# EAGLE board single-spi-interface (EAGLE 6.5.0)
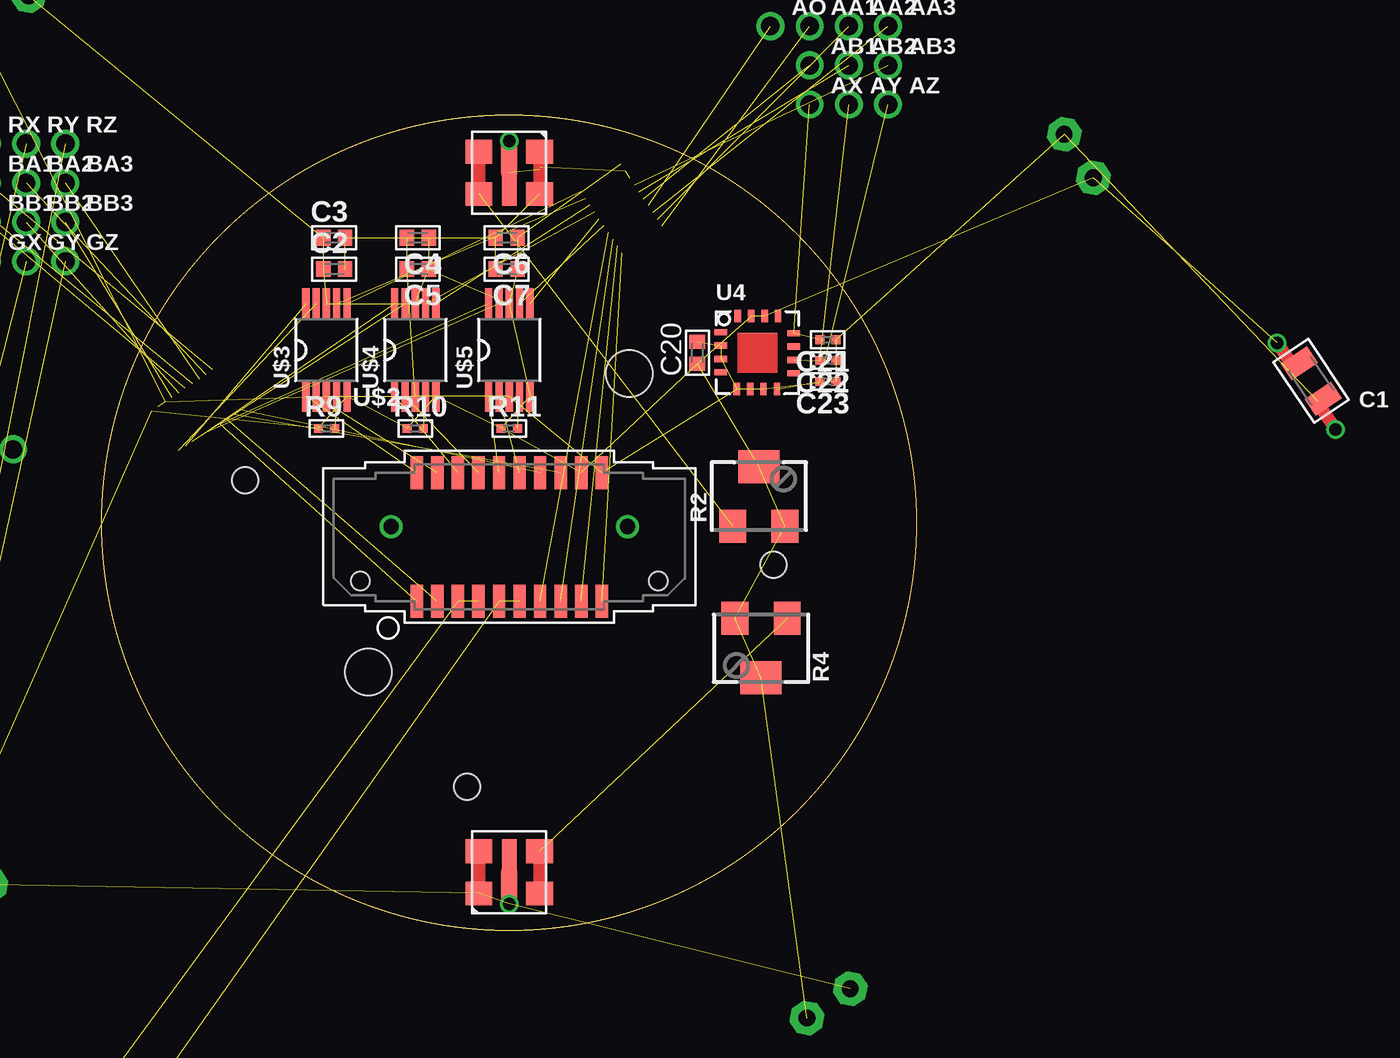
[diagram p0: board, top side]
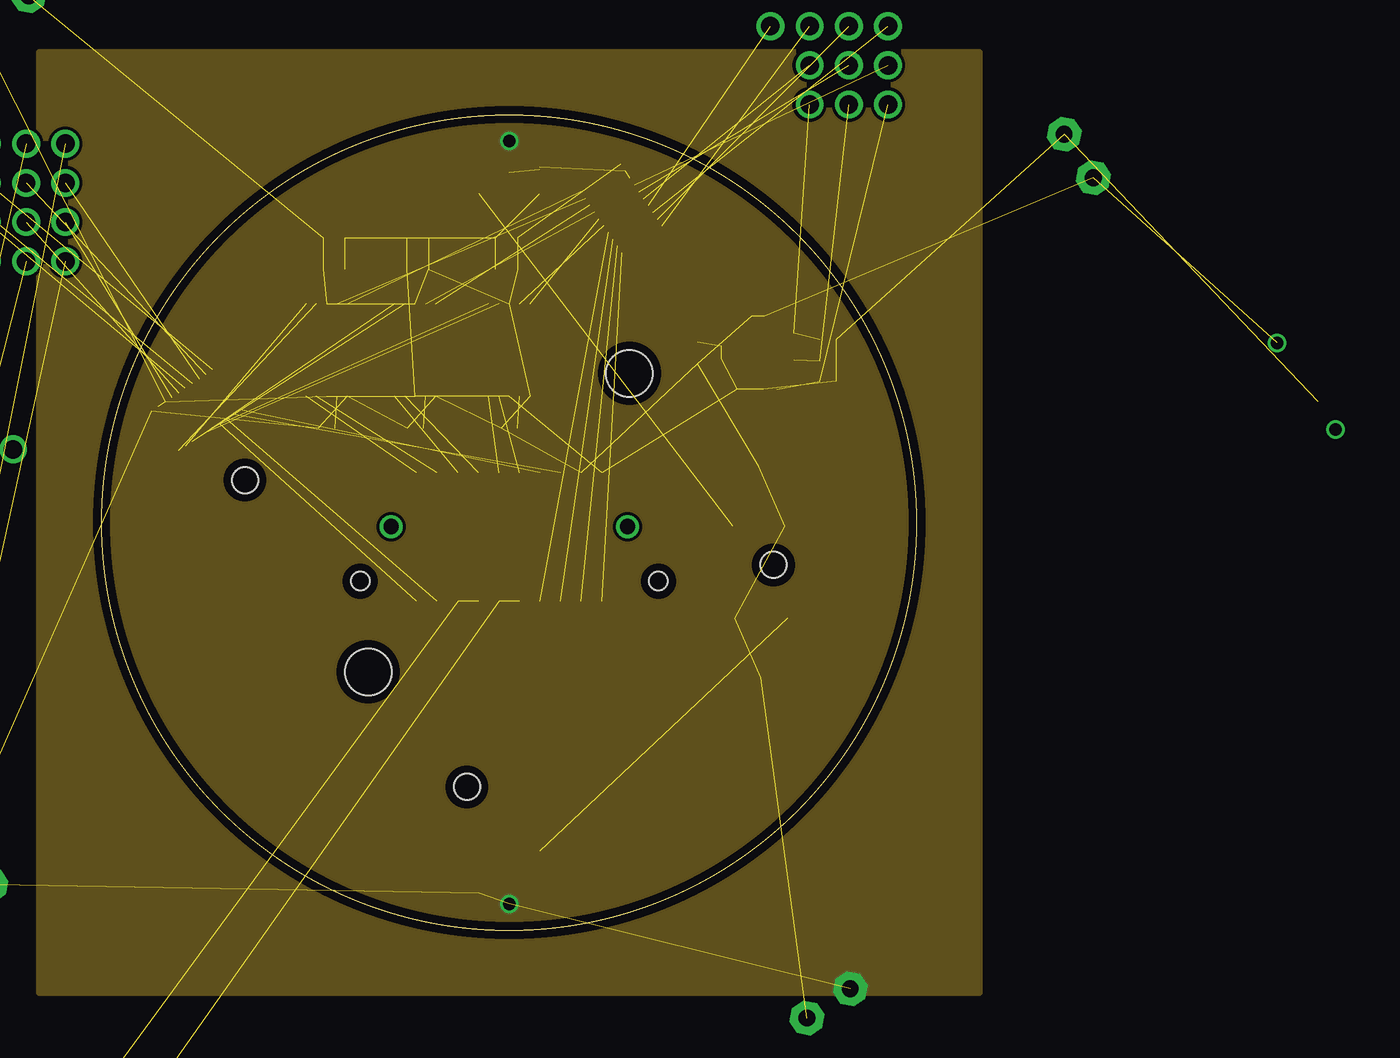
[diagram p1: board, inner layer Route2]
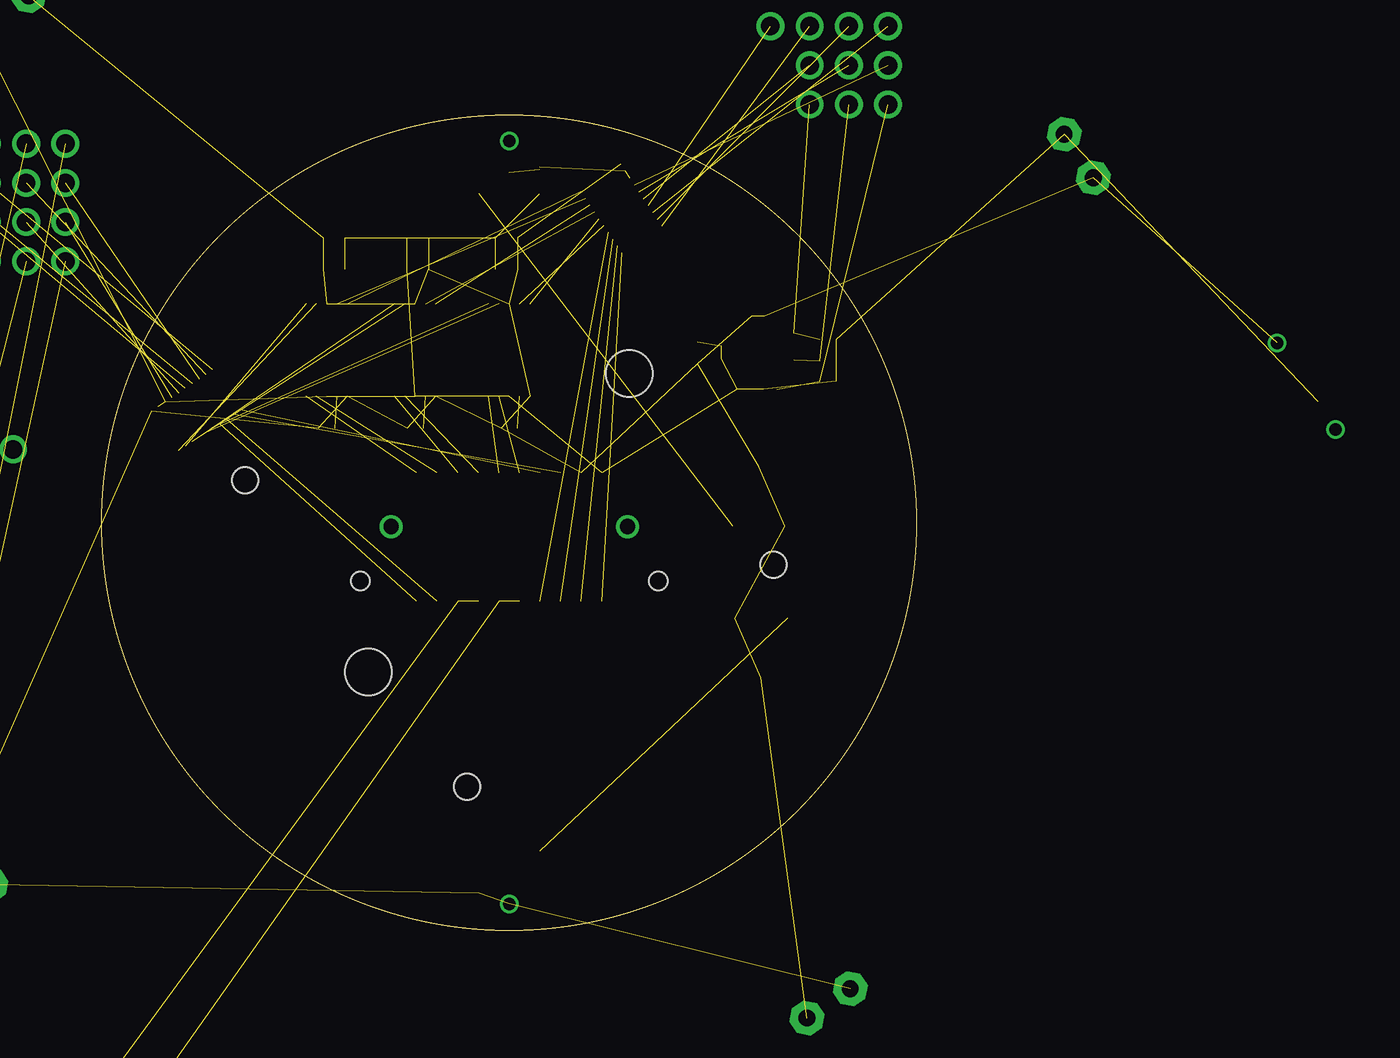
[diagram p2: board, inner layer Route15]
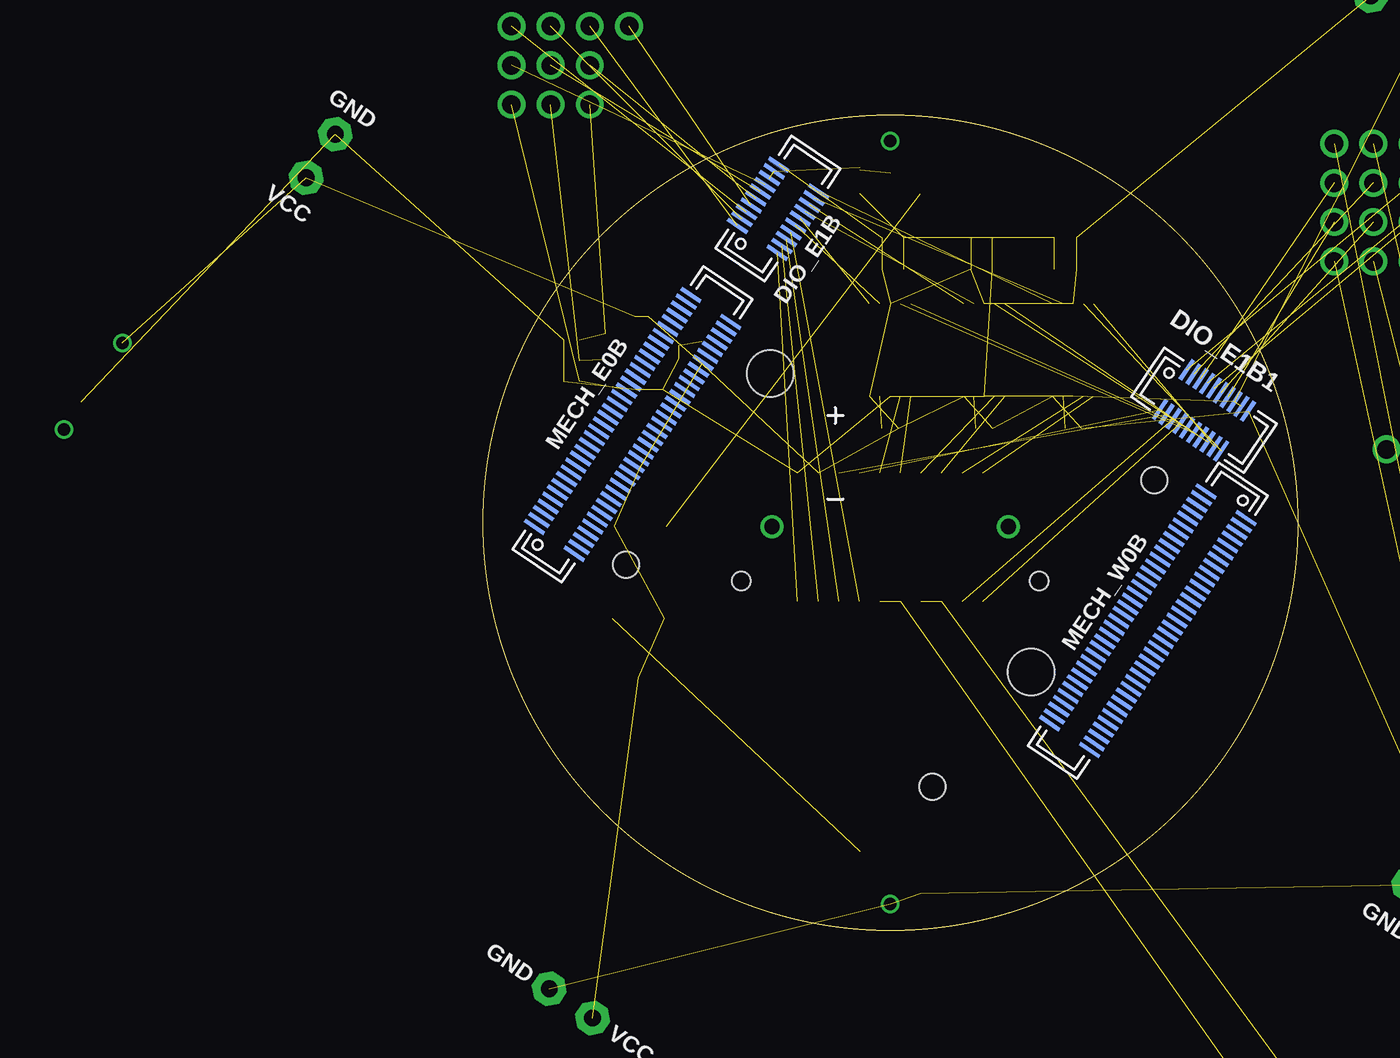
[diagram p3: board, bottom side, seen from below]

Size 39.62 x 39.62 mm. Coordinates in mm from the lower left corner, seen from the top.
Outline: circle at 19.81,19.81 radius 19.81
Copper layers (1*2*15*16): Top 0.035mm / dielectric 0.2mm / Route2 0.0175mm / dielectric 0.3mm / Route15 0.0175mm / dielectric 0.2mm / Bottom 0.035mm
Design rules "seeed-studio-4-layer": minimum track width 6mil, minimum drill 0.3mm, track to track 6mil, track to pad 6mil, pad to pad 6mil, via to via 6mil, smd to smd 0mil, copper to edge 0.4mm, drill to drill 10mil, minimum pad ring 6mil, minimum via ring 4mil, stop-mask expansion 4mil, vias tented up to drill 100mil, thermal gap 10mil
Net classes: 1 thick: width 0.102 mm
Holes 1.27 mm at 32.66,17.75 17.75,6.97 6.97,21.87
Holes 2.26 mm at 12.95,12.55 25.65,27.06

## Footprints (pad centres in the part's own frame; a part is rotated, then mirrored left to right if it is on the bottom)
TESTPOINT_0.035IN = drill 0.9: 1 0,0
LED-MLE = smd 1.3 x 1.15: A1 -1.475,1.025; A2 -1.475,-1.025; C1 1.475,1.025; C2 1.475,-1.025 | smd 0.7 x 3.2: HS 0,0
0805 = smd 0.965 x 1.524: 1 -1.041,0; 2 1.041,0
0402 = smd 0.686 x 0.762: 1 -0.533,0; 2 0.533,0
0201 = smd 0.432 x 0.432: 1 -0.394,0; 2 0.394,0
SOD-323 = smd 0.762 x 1.016: A -1.118,0; C 1.118,0
DF40-20REC = smd 0.2 x 1.14: 1 -1.8,1.17; 2 -1.4,1.17; 3 -1,1.17; 4 -0.6,1.17; 5 -0.2,1.17; 6 0.2,1.17; 7 0.6,1.17; 8 1,1.17; 9 1.4,1.17; 10 1.8,1.17; 11 1.8,-1.17; 12 1.4,-1.17; 13 1,-1.17; 14 0.6,-1.17; 15 0.2,-1.17; 16 -0.2,-1.17; 17 -0.6,-1.17; 18 -1,-1.17; 19 -1.4,-1.17; 20 -1.8,-1.17
TESTPOINT_SMALL = drill 0.813 pad 1.6 octagon: 1 0,0
DF40-70REC = smd 0.2 x 1.14: 1 -6.8,1.17; 2 -6.4,1.17; 3 -6,1.17; 4 -5.6,1.17; 5 -5.2,1.17; 6 -4.8,1.17; 7 -4.4,1.17; 8 -4,1.17; 9 -3.6,1.17; 10 -3.2,1.17; 11 -2.8,1.17; 12 -2.4,1.17; 13 -2,1.17; 14 -1.6,1.17; 15 -1.2,1.17; 16 -0.8,1.17; 17 -0.4,1.17; 18 0,1.17; 19 0.4,1.17; 20 0.8,1.17; 21 1.2,1.17; 22 1.6,1.17; 23 2,1.17; 24 2.4,1.17; 25 2.8,1.17; 26 3.2,1.17; 27 3.6,1.17; 28 4,1.17; 29 4.4,1.17; 30 4.8,1.17; 31 5.2,1.17; 32 5.6,1.17; 33 6,1.17; 34 6.4,1.17; 35 6.8,1.17; 36 6.8,-1.17; 37 6.4,-1.17; 38 6,-1.17; 39 5.6,-1.17; 40 5.2,-1.17; 41 4.8,-1.17; 42 4.4,-1.17; 43 4,-1.17; 44 3.6,-1.17; 45 3.2,-1.17; 46 2.8,-1.17; 47 2.4,-1.17; 48 2,-1.17; 49 1.6,-1.17; 50 1.2,-1.17; 51 0.8,-1.17; 52 0.4,-1.17; 53 0,-1.17; 54 -0.4,-1.17; 55 -0.8,-1.17; 56 -1.2,-1.17; 57 -1.6,-1.17; 58 -2,-1.17; 59 -2.4,-1.17; 60 -2.8,-1.17; 61 -3.2,-1.17; 62 -3.6,-1.17; 63 -4,-1.17; 64 -4.4,-1.17; 65 -4.8,-1.17; 66 -5.2,-1.17; 67 -5.6,-1.17; 68 -6,-1.17; 69 -6.4,-1.17; 70 -6.8,-1.17
SOT23-GSD = smd 0.8 x 0.9: D 0,0; G -0.95,-2.1; S 0.95,-2.1
SM-42/43W = smd 1.3 x 1.6: 1 -1.27,-1.45; 3 1.27,-1.45 | smd 2 x 1.6: 2 0,1.45
LGA-10-COMPACT = smd 0.6 x 0.7: 1 2.05,1.1; 2 0.635,1.1; 3 -0.635,1.1; 4 -2.05,1.1; 6 -2.05,-1.1; 7 -0.635,-1.1; 8 0.635,-1.1; 9 2.05,-1.1 | smd 0.7 x 0.6: 5 -2.05,0; 10 2.05,0
ADXL335 = smd 0.61 x 0.305: COM1 -1.775,-0.3; NC1 -1.775,1; NC2 -1.775,-0.95; NC3 1.775,-1; NC4 1.775,0.3; ST -1.775,0.35; XOUT 1.775,0.95; YOUT 1.775,-0.35 | smd 0.305 x 0.61: COM2 -1,-1.775; COM3 -0.35,-1.775; COM4 0.3,-1.775; NC5 1,1.775; NC6 -0.95,1.775; VS1 0.35,1.775; VS2 -0.3,1.775; ZOUT 0.95,-1.775
T1M-10-T-DV = smd 0.6 x 1.6: 1 -4.5,-4.395; 2 -3.5,-4.395; 3 -2.5,-4.395; 4 -1.5,-4.395; 5 -0.5,-4.395; 6 0.5,-4.395; 7 1.5,-4.395; 8 2.5,-4.395; 9 3.5,-4.395; 10 4.5,-4.395; 11 4.5,1.855; 12 3.5,1.855; 13 2.5,1.855; 14 1.5,1.855; 15 0.5,1.855; 16 -0.5,1.855; 17 -1.5,1.855; 18 -2.5,1.855; 19 -3.5,1.855; 20 -4.5,1.855 | drill 0.74: G1 -5.75,-0.77; G2 5.75,-0.77 | hole 0.89: -7.25,-3.42; 7.25,-3.42
10-UMAX = smd 1.5 x 0.35: 1 -2.25,1; 2 -2.25,0.5; 3 -2.25,0; 4 -2.25,-0.5; 5 -2.25,-1; 6 2.25,-1; 7 2.25,-0.5; 8 2.25,0; 9 2.25,0.5; 10 2.25,1
SOT-23-5 = smd 0.55 x 1: 1 -0.95,-1.35; 2 0,-1.35; 3 0.95,-1.35; 4 0.95,1.35; 5 -0.95,1.35
SOIC127P500X400-8N = smd 1.778 x 0.635: 1 -2.819,1.905; 2 -2.819,0.635; 3 -2.819,-0.635; 4 -2.819,-1.905; 5 2.819,-1.905; 6 2.819,-0.635; 7 2.819,0.635; 8 2.794,1.905

## Placement (x,y rotation side)
AA1  [TESTPOINT_0.035IN]  34.42,43.94 0 top  (outside the outline)
AA2  [TESTPOINT_0.035IN]  36.32,43.94 0 top  (outside the outline)
AA3  [TESTPOINT_0.035IN]  38.23,43.94 0 top  (outside the outline)
AB1  [TESTPOINT_0.035IN]  34.42,42.04 0 top
AB2  [TESTPOINT_0.035IN]  36.32,42.04 0 top
AB3  [TESTPOINT_0.035IN]  38.23,42.04 0 top
ANT  MLE-V01  [LED-MLE]  19.81,36.81 0 top
ANT1  MLE-V01  [LED-MLE]  -33.53,-36.19 90 top  (outside the outline)
ANT2  MLE-V01  [LED-MLE]  -15.37,-35.81 90 top  (outside the outline)
AO  [TESTPOINT_0.035IN]  32.51,43.94 0 top  (outside the outline)
AX  [TESTPOINT_0.035IN]  34.42,40.13 0 top
AY  [TESTPOINT_0.035IN]  36.32,40.13 0 top
AZ  [TESTPOINT_0.035IN]  38.23,40.13 0 top
B0  [TESTPOINT_0.035IN]  -7.49,36.32 0 top  (outside the outline)
BA1  [TESTPOINT_0.035IN]  -5.59,36.32 0 top  (outside the outline)
BA2  [TESTPOINT_0.035IN]  -3.68,36.32 0 top  (outside the outline)
BA3  [TESTPOINT_0.035IN]  -1.78,36.32 0 top
BB1  [TESTPOINT_0.035IN]  -5.59,34.42 0 top  (outside the outline)
BB2  [TESTPOINT_0.035IN]  -3.68,34.42 0 top  (outside the outline)
BB3  [TESTPOINT_0.035IN]  -1.78,34.42 0 top
C1  10uF  [0805]  58.81,26.7 304 top  (outside the outline)
C2  1nF  [0402]  11.3,32.13 0 top
C3  0.1uF  [0402]  11.3,33.66 0 top
C4  1nF  [0402]  15.37,33.66 180 top
C5  0.1uF  [0402]  15.37,32.13 180 top
C6  1nF  [0402]  19.69,33.66 180 top
C7  0.1uF  [0402]  19.69,32.13 180 top
C8  0.1uF  [0402]  -21.97,-51.44 90 top  (outside the outline)
C9  0.1uF  [0402]  -20.45,-43.18 90 top  (outside the outline)
C10  10uF  [0805]  -18.16,-42.67 270 top  (outside the outline)
C11  10nF  [0201]  -31.62,-105.54 0 top  (outside the outline)
C12  470nF  [0201]  -42.8,-101.35 0 top  (outside the outline)
C13  470nF  [0201]  -37.21,-101.35 0 top  (outside the outline)
C14  10nF  [0201]  -26.92,-105.54 0 top  (outside the outline)
C15  470nF  [0201]  -31.62,-101.35 0 top  (outside the outline)
C16  470nF  [0201]  -26.04,-101.35 0 top  (outside the outline)
C17  10nF  [0201]  -42.8,-109.73 0 top  (outside the outline)
C18  470nF  [0201]  -42.8,-105.54 0 top  (outside the outline)
C19  470nF  [0201]  -37.21,-105.54 0 top  (outside the outline)
C20  .1uF  [0402]  28.96,28.07 90 top
C21  .1uF  [0201]  35.31,28.7 180 top
C22  .1uF  [0201]  35.31,27.69 180 top
C23  .1uF  [0201]  35.31,26.67 180 top
C24  10uF  [0805]  -133.35,-153.92 0 top  (outside the outline)
D1  PDZ10B,115  [SOD-323]  -26.42,-34.54 0 top  (outside the outline)
D2  PDZ10B,115  [SOD-323]  -22.35,-34.54 0 top  (outside the outline)
DIO_E1B  [DF40-20REC]  25.27,35.07 56 bottom
DIO_E1B1  [DF40-20REC]  4.55,25.27 326 bottom
GX  [TESTPOINT_0.035IN]  -5.59,32.51 0 top  (outside the outline)
GY  [TESTPOINT_0.035IN]  -3.68,32.51 0 top  (outside the outline)
GZ  [TESTPOINT_0.035IN]  -1.78,32.51 0 top
LED1+  [TESTPOINT_SMALL]  -31.11,-31.62 0 top  (outside the outline)
LED1-  [TESTPOINT_SMALL]  -13.97,-31.11 0 top  (outside the outline)
LED2+  [TESTPOINT_SMALL]  -18.41,-31.37 0 top  (outside the outline)
LED2-  [TESTPOINT_SMALL]  -35.56,-31.88 0 top  (outside the outline)
MECH_E0B  [DF40-70REC]  32.34,24.59 56 bottom
MECH_W0B  [DF40-70REC]  7.28,15.04 236 bottom
POST  MLE-T01  [LED-MLE]  19.81,2.81 180 top
Q1  AO3402  [SOT23-GSD]  -26.42,-38.1 180 top  (outside the outline)
Q2  AO3402  [SOT23-GSD]  -22.35,-38.1 180 top  (outside the outline)
R1  300  [0402]  -24.51,-48.39 180 top  (outside the outline)
R2  20k  [SM-42/43W]  31.95,21.08 0 top
R3  24, 1W  [0805]  -29.59,-36.19 90 top  (outside the outline)
R4  20k  [SM-42/43W]  32.06,13.72 180 top
R5  24, 1W  [0805]  -18.67,-36.07 90 top  (outside the outline)
R6  10k  [0201]  -38.1,-109.73 0 top  (outside the outline)
R7  10k  [0201]  -34.54,-109.73 0 top  (outside the outline)
R8  10k  [0201]  -30.99,-109.73 0 top  (outside the outline)
R9  0  [0201]  10.92,24.38 0 top
R10  0  [0201]  15.24,24.38 0 top
R11  0  [0201]  19.81,24.38 0 top
RX  [TESTPOINT_0.035IN]  -5.59,38.23 0 top  (outside the outline)
RY  [TESTPOINT_0.035IN]  -3.68,38.23 0 top  (outside the outline)
RZ  [TESTPOINT_0.035IN]  -1.78,38.23 0 top
TP1  [TESTPOINT_SMALL]  -7.32,3.3 34 top  (outside the outline)
TP2  [TESTPOINT_SMALL]  34.29,-4.27 34 top  (outside the outline)
TP3  [TESTPOINT_SMALL]  48.22,36.58 34 top  (outside the outline)
TP4  [TESTPOINT_SMALL]  -3.56,45.42 34 top  (outside the outline)
TP5  [TESTPOINT_SMALL]  -5.39,2.21 34 top  (outside the outline)
TP6  [TESTPOINT_SMALL]  36.4,-2.85 34 top
TP7  [TESTPOINT_SMALL]  46.8,38.68 34 top  (outside the outline)
TP8  [TESTPOINT_SMALL]  -6.68,45.02 34 top  (outside the outline)
U1  LY3200  [LGA-10-COMPACT]  -41.02,-95.76 0 top  (outside the outline)
U2  LY3200  [LGA-10-COMPACT]  -34.54,-95.76 0 top  (outside the outline)
U3  LY3200  [LGA-10-COMPACT]  -28.07,-95.76 0 top  (outside the outline)
U4  ADXL335  [ADXL335]  31.88,28.07 0 top
U$2  [T1M-10-T-DV]  19.81,20.38 0 top
U$3  MAX9174_UMAX  [10-UMAX]  10.92,28.19 90 top
U$4  MAX9174_UMAX  [10-UMAX]  15.24,28.19 90 top
U$5  MAX9174_UMAX  [10-UMAX]  19.81,28.19 90 top
U$6  NC7SZ125  [SOT-23-5]  -24.38,-51.31 0 top  (outside the outline)
U$7  SI822X  [SOIC127P500X400-8N]  -24.26,-43.43 90 top  (outside the outline)

## Library data of the parts
AA1-AA3 AB1-AB3 ANT ANT1 ANT2 AO AX AY AZ B0 BA1-BA3 BB1-BB3 C2-C9 C11-C19 C21-C23 D1 D2 DIO_E1B DIO_E1B1 GX GY GZ LED1+ LED1- LED2+ LED2- MECH_E0B MECH_W0B POST Q1 Q2 R1-R11 RX RY RZ TP1-TP8 U1-U4 U$2-U$7 = jonnew
C1 C24 = headstage; MN: TDK Corp.; PARTNO: C2012X5R1Cxxxxxxx; VID: DK
C10 = jonnew; MN: TDK Corp.; PARTNO: C2012X5R1Cxxxxxxx; VID: DK
C20 = headstage

## Nets
AUXIN1_HSA_A: AA1.1 DIO_E1B.1
AUXIN1_HSA_B: AB1.1 DIO_E1B.5
AUXIN1_HSB_A: BA1.1 DIO_E1B1.1
AUXIN1_HSB_B: BB1.1 DIO_E1B1.5
AUXIN2_HSA_A: AA2.1 DIO_E1B.2
AUXIN2_HSA_B: AB2.1 DIO_E1B.6
AUXIN2_HSB_A: BA2.1 DIO_E1B1.2
AUXIN2_HSB_B: BB2.1 DIO_E1B1.6
AUXIN3_HSA_A: AA3.1 DIO_E1B.3
AUXIN3_HSA_B: AB3.1 DIO_E1B.7
AUXIN3_HSB_A: BA3.1 DIO_E1B1.3
AUXIN3_HSB_B: BB3.1 DIO_E1B1.7
AUXOUT_HSA_B: AO.1 DIO_E1B.4
AUXOUT_HSB_B: B0.1 DIO_E1B1.4
CS+: U$2.20 U$3.1
CS+_HSA: DIO_E1B.12 U$3.7
CS+_HSB: DIO_E1B1.12 U$3.10
CS-: U$2.19 U$3.2
CS-_HSA: DIO_E1B.11 U$3.6
CS-_HSB: DIO_E1B1.11 U$3.9
GND: ANT.C1 ANT.C2 ANT.HS C1.2 C2.2 C3.2 C4.2 C5.2 C6.2 C7.2 C8.2 C11.2 C13.2 C14.2 C16.2 C17.2 C19.2 C20.2 C21.1 C22.1 C23.1 C24.2 DIO_E1B1.8 DIO_E1B1.9 DIO_E1B.8 DIO_E1B.9 POST.C1 POST.C2 POST.HS R6.2 R7.2 R8.2 TP5.1 TP6.1 TP7.1 TP8.1 U1.2 U1.4 U1.8 U2.2 U2.4 U2.8 U3.2 U3.4 U3.8 U4.COM1 U4.COM2 U4.COM3 U4.COM4 U4.ST U$2.11 U$3.3 U$4.3 U$5.3 U$6.1 U$6.3 U$7.3
MISO1+: DIO_E1B.18 U$2.8
MISO1-: DIO_E1B.17 U$2.7
MISO2+: DIO_E1B.20 U$2.10
MISO2-: DIO_E1B.19 U$2.9
MISO3+: DIO_E1B1.18 U$2.2
MISO3-: DIO_E1B1.17 U$2.1
MISO4+: DIO_E1B1.20 U$2.14
MISO4-: DIO_E1B1.19 U$2.13
MOSI+: U$2.16 U$5.1
MOSI+_HSA: DIO_E1B.16 U$5.7
MOSI+_HSB: DIO_E1B1.16 U$5.10
MOSI-: U$2.15 U$5.2
MOSI-_HSA: DIO_E1B.15 U$5.6
MOSI-_HSB: DIO_E1B1.15 U$5.9
N$1: R1.2 U$7.2
N$2: C11.1 C12.1 U1.3
N$3: ANT1.A1 ANT1.A2 LED1+.1 R3.1
N$4: D1.A Q1.S R3.2
N$5: U$6.2
N$6: R1.1 U$6.4
N$7: D1.C D2.C Q1.G Q2.G U$7.6 U$7.7
N$8: C12.2 R6.1
N$9: ANT.A1 ANT.A2 R2.1
N$10: C14.1 C15.1 U2.3
N$11: D2.A Q2.S R5.2
N$12: ANT2.A1 ANT2.A2 LED2+.1 R5.1
N$13: POST.A1 POST.A2 R4.1
N$14: C15.2 R7.1
N$15: C17.1 C18.1 U3.3
N$16: C18.2 R8.1
N$17: R9.2 U$3.4
N$18: R11.2 U$5.4
N$19: R10.2 U$4.4
OUT: GX.1 U1.6
OUT1: GY.1 U2.6
OUT2: GZ.1 U3.6
SCLK+: U$2.18 U$4.1
SCLK+_HSA: DIO_E1B.14 U$4.7
SCLK+_HSB: DIO_E1B1.14 U$4.10
SCLK-: U$2.17 U$4.2
SCLK-_HSA: DIO_E1B.13 U$4.6
SCLK-_HSB: DIO_E1B1.13 U$4.9
VCC: C1.1 C2.1 C3.1 C4.1 C5.1 C6.1 C7.1 C8.1 C13.1 C16.1 C19.1 C20.1 C24.1 DIO_E1B1.10 DIO_E1B.10 R2.2 R2.3 R4.2 R4.3 R9.1 R10.1 R11.1 TP1.1 TP2.1 TP3.1 TP4.1 U1.1 U1.9 U1.10 U2.1 U2.9 U2.10 U3.1 U3.9 U3.10 U4.VS1 U4.VS2 U$2.12 U$3.5 U$3.8 U$4.5 U$4.8 U$5.5 U$5.8 U$6.5
VDD: C9.2 C10.1 Q1.D Q2.D U$2.3 U$2.4 U$7.8
VREF: RX.1 U1.7
VREF1: RY.1 U2.7
VREF2: RZ.1 U3.7
VSS: ANT1.C1 ANT1.C2 ANT1.HS ANT2.C1 ANT2.C2 ANT2.HS C9.1 C10.2 LED1-.1 LED2-.1 U$2.5 U$2.6 U$7.5
XOUT1: AX.1 C21.2 U4.XOUT
YOUT1: AY.1 C22.2 U4.YOUT
ZOUT1: AZ.1 C23.2 U4.ZOUT

## Tracks (layer width: path | path; a pad name or v marks a point on that pad's centre or on a via)
AUXIN1_HSA_A  (1 unrouted)
AUXIN1_HSA_B  (1 unrouted)
AUXIN1_HSB_A  (1 unrouted)
AUXIN1_HSB_B  (1 unrouted)
AUXIN2_HSA_A  (1 unrouted)
AUXIN2_HSA_B  (1 unrouted)
AUXIN2_HSB_A  (1 unrouted)
AUXIN2_HSB_B  (1 unrouted)
AUXIN3_HSA_A  (1 unrouted)
AUXIN3_HSA_B  (1 unrouted)
AUXIN3_HSB_A  (1 unrouted)
AUXIN3_HSB_B  (1 unrouted)
AUXOUT_HSA_B  (1 unrouted)
AUXOUT_HSB_B  (1 unrouted)
CS+  (1 unrouted)
CS+_HSA  (1 unrouted)
CS+_HSB  (1 unrouted)
CS-  (1 unrouted)
CS-_HSA  (1 unrouted)
CS-_HSB  (1 unrouted)
GND  (via drill 0.6)  (53 unrouted)
  Top 0.61: v59.99,24.34 59.14,25.6 59.15,25.67 C1.2 | 21.29,37.08 21.29,36.96 ANT.C1 ANT.C2 | POST.C1 POST.C2
  Top 0.813: POST.HS v19.81,1.27 | ANT.HS v19.81,38.35
  pour Route2 (no thermals): -3.05,-3.05 -3.05,42.67 42.67,42.67 42.67,-3.05
  pour Bottom (no thermals): 26.35,34.64 26.78,34.01 27.62,34.58 27.2,35.21
  pour Bottom (no thermals): 25.5,35.9 25.93,35.27 26.77,35.84 26.34,36.47
MISO1+  (1 unrouted)
MISO1-  (1 unrouted)
MISO2+  (1 unrouted)
MISO2-  (1 unrouted)
MISO3+  (1 unrouted)
MISO3-  (1 unrouted)
MISO4+  (1 unrouted)
MISO4-  (1 unrouted)
MOSI+  (1 unrouted)
MOSI+_HSA  (1 unrouted)
MOSI+_HSB  (1 unrouted)
MOSI-  (1 unrouted)
MOSI-_HSA  (1 unrouted)
MOSI-_HSB  (1 unrouted)
N$1  (1 unrouted)
N$2  (2 unrouted)
N$3  (3 unrouted)
N$4  (2 unrouted)
N$6  (1 unrouted)
N$7  (5 unrouted)
N$8  (1 unrouted)
N$9  (1 unrouted)
  Top 0.61: ANT.A1 ANT.A2
N$10  (2 unrouted)
N$11  (2 unrouted)
N$12  (3 unrouted)
N$13  (1 unrouted)
  Top 0.61: POST.A1 POST.A2
N$14  (1 unrouted)
N$15  (2 unrouted)
N$16  (1 unrouted)
N$17  (1 unrouted)
N$18  (1 unrouted)
N$19  (1 unrouted)
N$21  (via drill 0.9)
  other vias: -4.32,23.37
OUT  (1 unrouted)
OUT1  (1 unrouted)
OUT2  (1 unrouted)
SCLK+  (1 unrouted)
SCLK+_HSA  (1 unrouted)
SCLK+_HSB  (1 unrouted)
SCLK-  (1 unrouted)
SCLK-_HSA  (1 unrouted)
SCLK-_HSB  (1 unrouted)
VCC  (via drill 0.6)  (44 unrouted)
  Top 0.61: v57.15,28.55 57.93,27.39 57.96,27.38 C1.1
  pour Route15 (no thermals): -3.05,-3.05 -3.05,42.67 42.67,42.67 42.67,-3.05
  pour Bottom (no thermals): 25.22,36.33 24.79,36.96 25.63,37.53 26.06,36.89
VDD  (6 unrouted)
VREF  (1 unrouted)
VREF1  (1 unrouted)
VREF2  (1 unrouted)
VSS  (12 unrouted)
XOUT1  (2 unrouted)
YOUT1  (2 unrouted)
ZOUT1  (2 unrouted)

## Text on the board
tPlace: VCC | CC BY-SA-NC-4.0 / JPN, MWL@MIT / 2016 | (0,-2.5) / mm | GND | GND | VCC | GND | VCC | 128 Channel SPI / Interface / Rev. 1.3
bPlace: GND | VCC | GND | VCC | VCC | GND | GND | VCC